# Altium PCB dnt_mko.PcbDoc (part 1 of 2)
Units mm, origin at the board's own origin, x right, y up, seen from the top; angles counter-clockwise.
Board outline 128.25 x 60.25 mm, 6 copper layers (Top Layer, Signal Layer 1, Signal Layer 2, GND plane, Power layer, Bottom Layer), stack 1.5 mm thick; 122 components, 105 nets, 539 pads, 282 vias.
Unrouted connection lines stored in the file: 1.
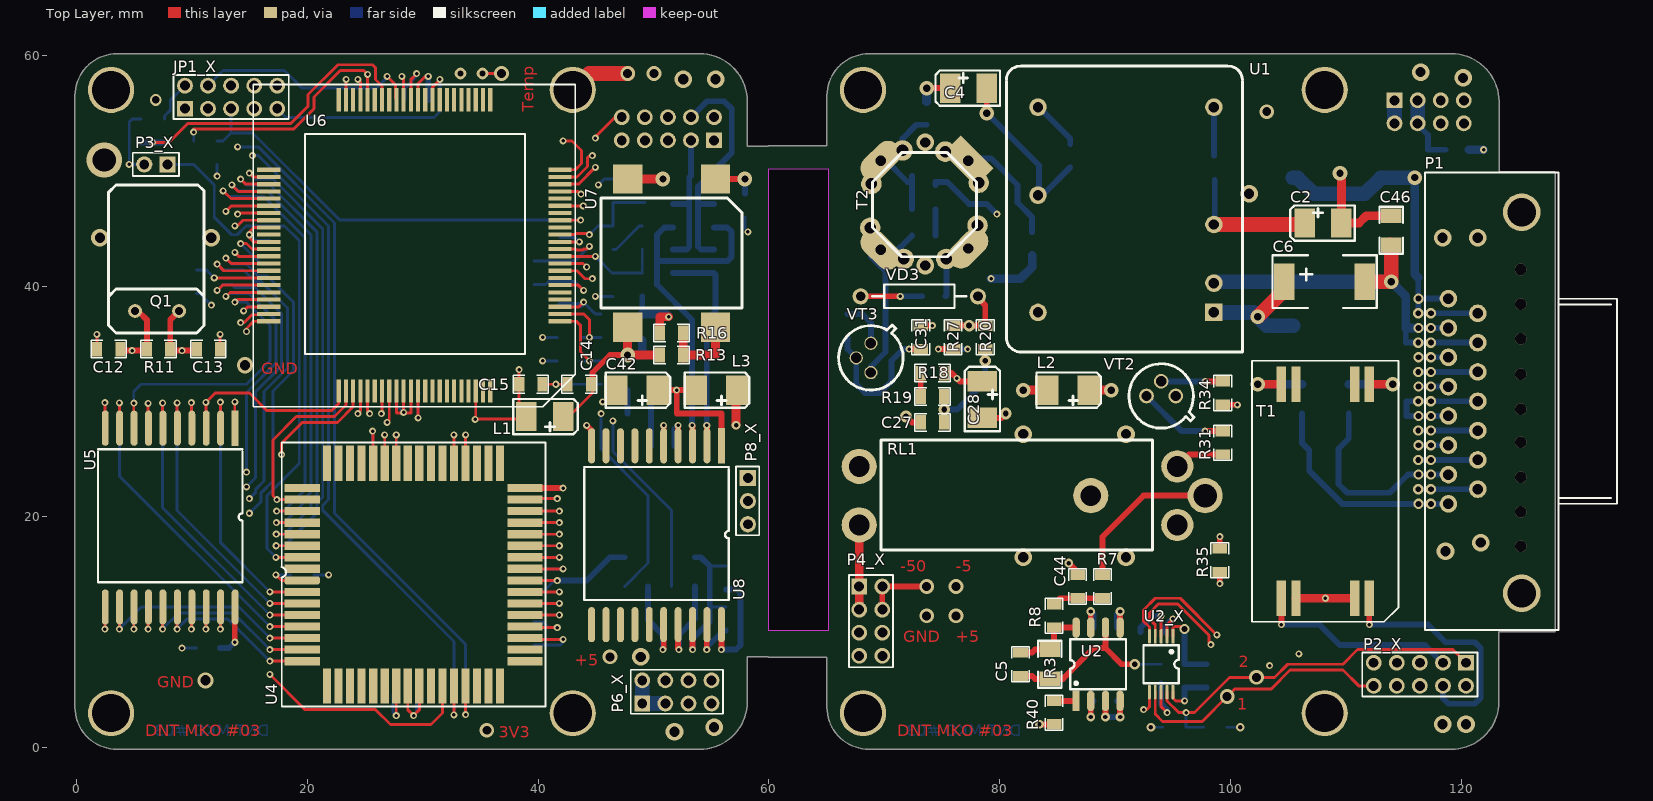
[diagram p0: Top Layer view]
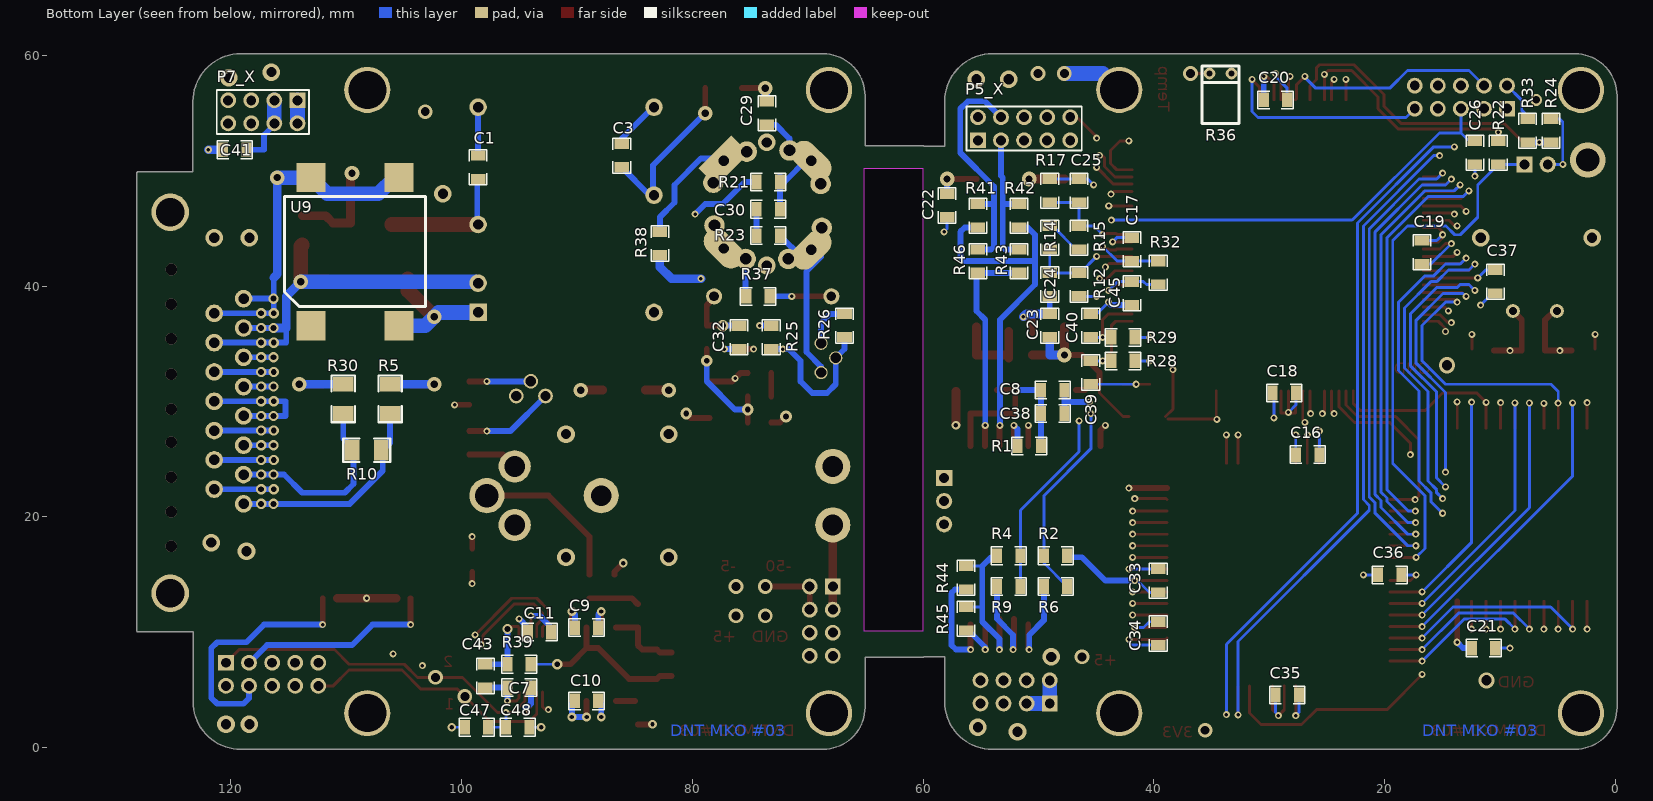
[diagram p1: Bottom Layer view, seen from below]
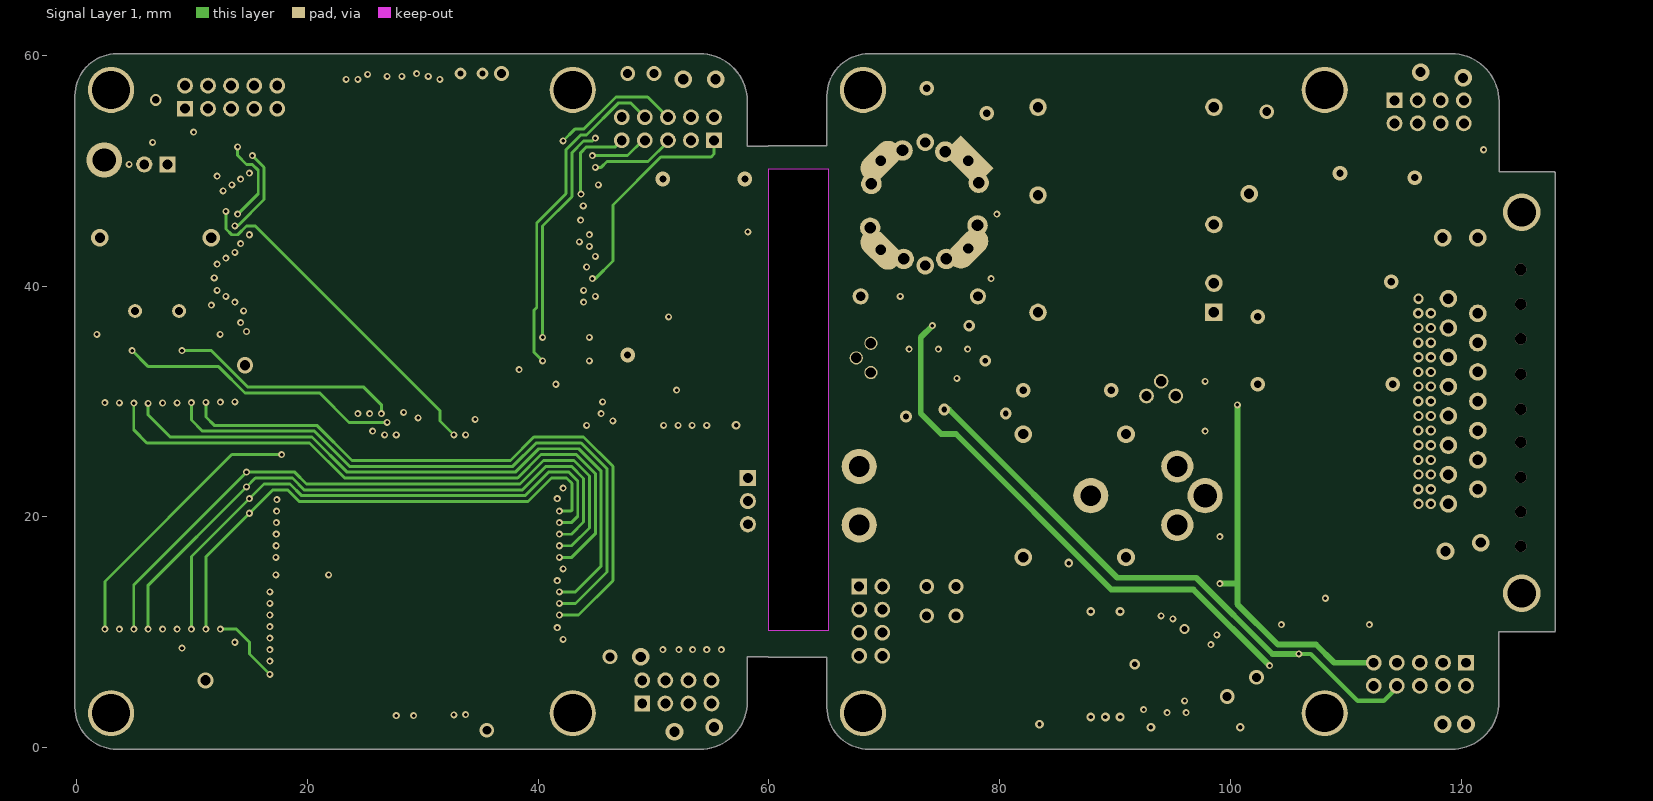
[diagram p2: Signal Layer 1]
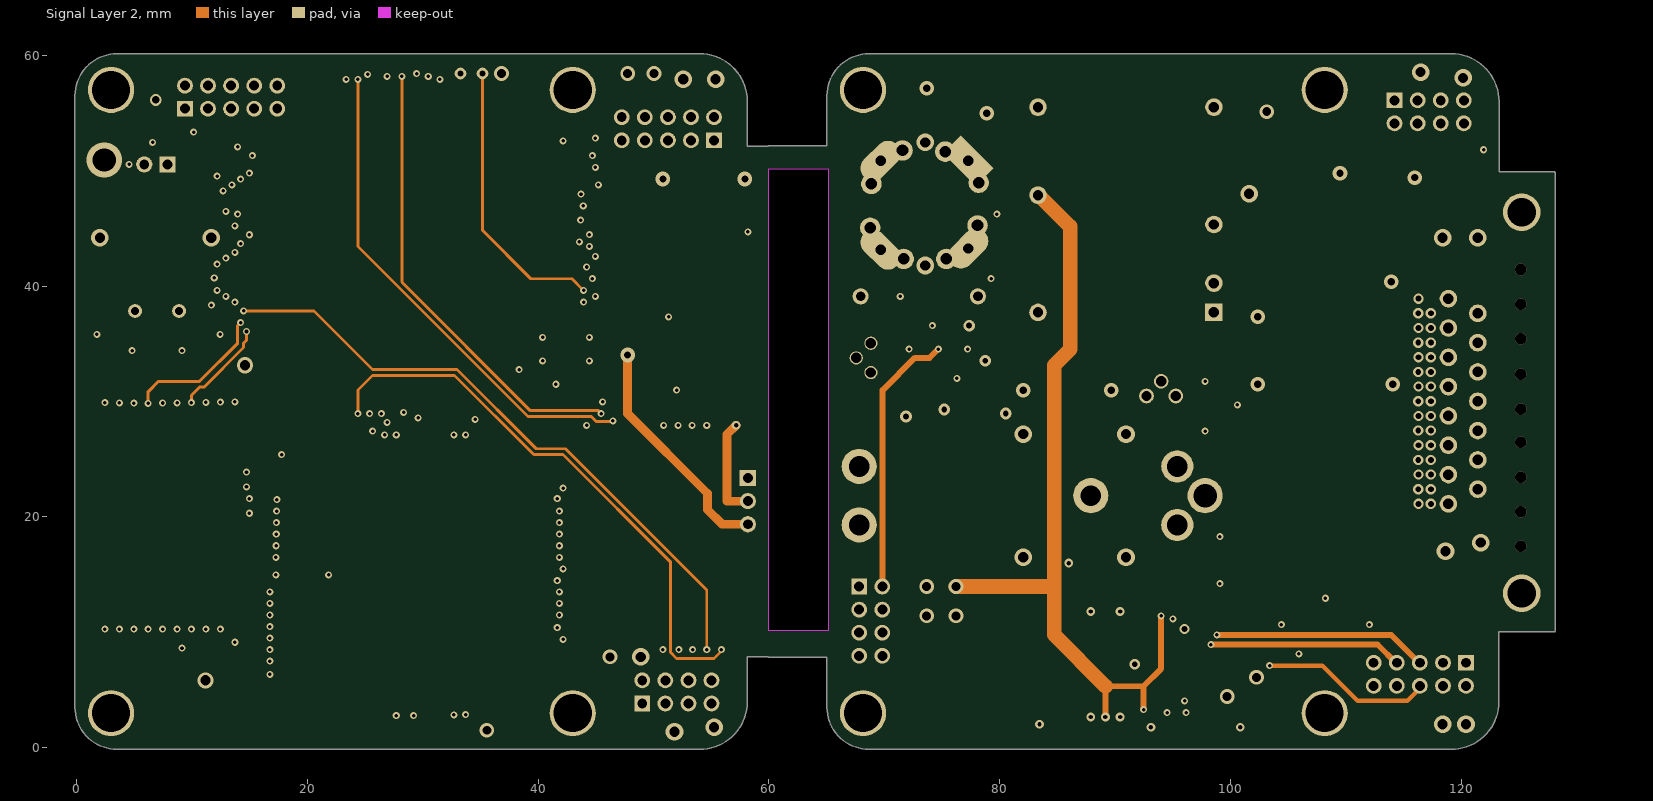
[diagram p3: Signal Layer 2]
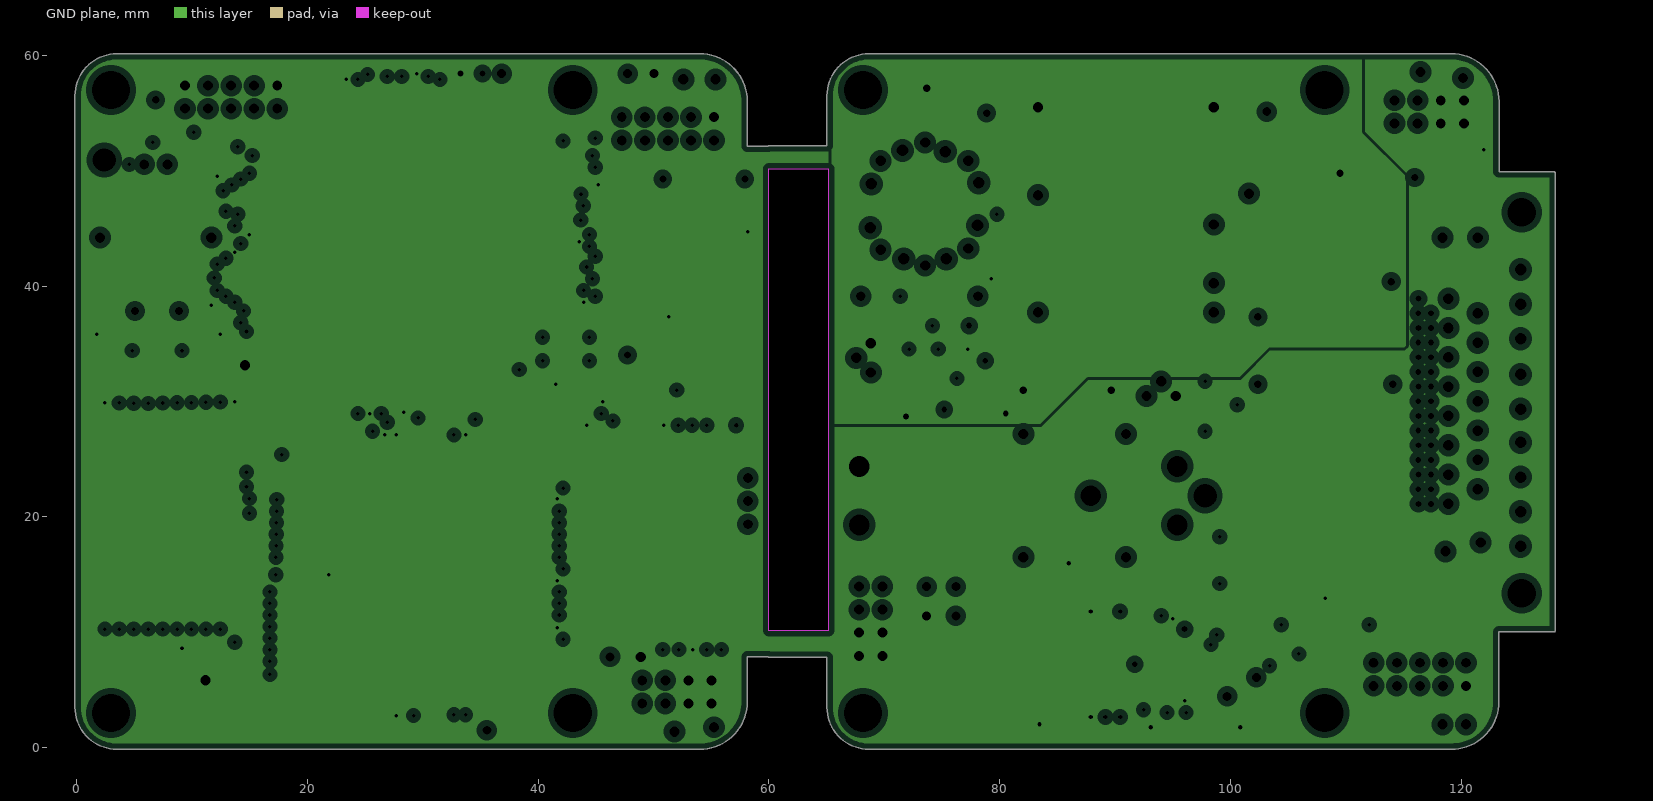
[diagram p4: GND plane, clearances drawn from the general rule]
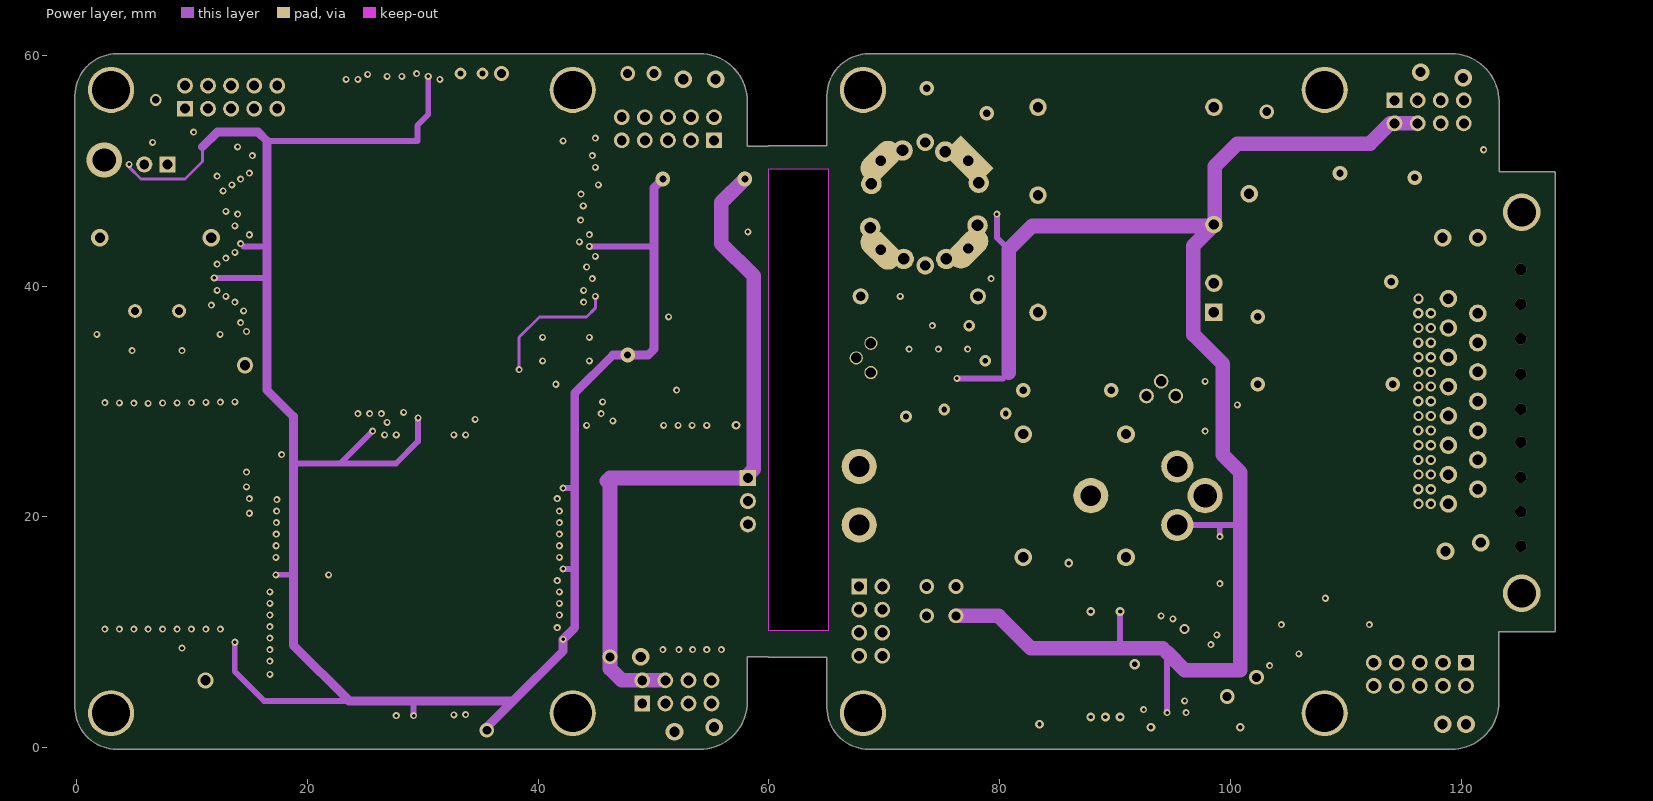
[diagram p5: Power layer]

## Layer stack, top to bottom
Top Layer: signal copper 0.03
Dielectric1: core 0.35, FR-4, Dk 4.8
Signal Layer 1: signal copper 0.03
Dielectric 5: prepreg 0.12, Dk 4.2
Signal Layer 2: signal copper 0.36
Dielectric 4: core 0.2, Dk 4.2
GND plane: plane copper 0.03, net (Multiple Nets)
Dielectric3: prepreg 0.12, FR-4, Dk 4.2
Power layer: signal copper 0.03
Dielectric2: core 0.2, FR-4, Dk 4.2
Bottom Layer: signal copper 0.03

## Board outline
3.5,-0.127 54,-0.127 ccw(c54,4) 58.127,4 58.127,7.873 59.92,7.873 ccw(c60,8) 60,7.85 65.024,7.85 65.024,3.5 ccw(c68.651,3.5) 68.651,-0.127 119.38,-0.127 ccw(c119.38,0) 119.433,-0.116 ccw(c119.123,4) 123.25,4 123.25,10.033 128,10.033 ccw(c128,10.16) 128.127,10.16 128.127,49.784 ccw(c128,49.784) 128,49.911 123.253,49.911 123.253,56 ccw(c119.126,56) 119.126,60.127 68.651,60.127 ccw(c68.651,56.5) 65.024,56.5 65.024,52.15 60,52.15 ccw(c60,52) 59.92,52.127 58.127,52.127 58.127,56 ccw(c54,56) 54,60.127 3.5,60.127 ccw(c3.5,56.5) -0.127,56.5 -0.127,3.5 ccw(c3.5,3.5)
cut-out: 60,50.165 65.151,50.165 65.151,10.16 60,10.16

## Design rules (kind name [scope] priority, off if disabled: settings)
Clearance [All] p1: gap=0.2 ignorepadtopadclearanceinfootprint=FALSE
PlaneClearance [All] p1: clearance=0.508
PlaneConnect [All] p1: planeconnectstyle=Relief reliefexpansion=0.508 reliefentries=4 reliefconductorwidth=0.254 reliefairgap=0.254
PolygonConnect [All] p1: connectstyle=Relief reliefconductorwidth=0.254 reliefentries=4 polygonreliefangle="90 Angle" airgapwidth=0.254
RoutingVias [All] p1: holewidth=0.711 width=1.27 viastyle="Through Hole" minholewidth=0.2 minwidth=0.61 maxholewidth=0.711 maxwidth=1.27
SilkToSolderMaskClearance SilkscreenOverComponentPads [IsPad] p1: minsilkscreentomaskgap=0.254 clearancetoexposedcopper=TRUE
SolderMaskExpansion [All] p1: expansion=0.102 istentingtop=FALSE
Width [All] p1: maxlimit=1.27 minlimit=0.254 preferedwidth=0.254
27 further rules are at their usual default settings.

## Components (designator, comment, footprint, x,y, rotation, side; value= is the part's Value field where it differs from the comment)
C1 "0.1uF" CR-0805 98.552,51.308 r270 bottom
C2 "22uF 16V" C_SMD_SIZE_B#1 106.426,45.466 r0 top
C3 "0.1uF" CR-0805 86.106,50.292 r90 bottom
C4 "22uF 16V" C_SMD_SIZE_B#1 75.692,57.15 r0 top
C5 "1500 pF" CR-0805 81.788,6.223 r90 top
C6 "15мкФ, 50В" C_SMD_size_D 104.648,40.386 r0 top
C7 "0.1uF" CR-0805 93.98,5.207 r0 bottom
C8 "10uF" CR-0805 47.752,30.988 r0 bottom
C9 "0.1uF" CR-0805 90.17,10.414 r180 bottom
C10 "0.1uF" CR-0805 90.17,4.064 r180 bottom
C11 "0.1uF" CR-0805 94.234,10.033 r180 bottom
C12 "24pF" CR-0805 1.778,34.544 r0 top
C13 "24pF" CR-0805 12.446,34.544 r180 top
C14 "0.22uF" CR-0805 42.545,31.496 r0 top
C15 "0.22uF" CR-0805 40.386,31.496 r180 top
C16 "0.22uF" CR-0805 27.686,25.4 r180 bottom
C17 "0.22uF" CR-0805 41.91,44.196 r270 bottom
C18 "0.22uF" CR-0805 27.686,30.734 r0 bottom
C19 "0.22uF" CR-0805 16.764,43.942 r270 bottom
C20 "0.22uF" CR-0805 28.448,56.134 r0 bottom
C21 "0.22uF" CR-0805 12.446,8.636 r180 bottom
C22 "10uF" CR-0805 57.912,48.006 r270 bottom
C23 "10uF" CR-0805 49.022,35.56 r90 bottom
C24 "0.22uF" CR-0805 49.022,41.148 r270 bottom
C25 "0.22uF" CR-0805 46.482,47.244 r90 bottom
C26 "0.22uF" CR-0805 12.192,52.578 r270 bottom
C27 "10nF" CR-0805 73.152,28.194 r0 top
C28 "22uF 16V" C_SMD_SIZE_B#1 78.486,31.75 r270 top
C29 "1uF" CR-0805 73.533,53.975 r90 bottom
C30 "3300pF" CR-0805 72.39,46.66 r0 bottom
C31 "1000pF" CR-0805 73.152,34.544 r90 top
C32 "0.47uF 100V" CR-0805 75.946,34.544 r90 bottom
C33 "0.22uF" CR-0805 39.624,13.462 r90 bottom
C34 "0.22uF" CR-0805 39.624,10.922 r270 bottom
C35 "0.22uF" CR-0805 27.432,4.572 r0 bottom
C36 "0.22uF" CR-0805 20.574,14.986 r180 bottom
C37 "0.22uF" CR-0805 10.414,39.37 r90 bottom
C38 "0.1uF" CR-0805 47.752,28.956 r0 bottom
C39 "4.7uF" CR-0805 45.466,31.496 r90 bottom
C40 "4.7uF" CR-0805 45.466,35.56 r90 bottom
C41 "10uF" CR-0805 118.618,51.816 r0 bottom
C42 "22uF 16V" C_SMD_SIZE_B#2 50.292,30.988 r180 top
C43 "4.7uF" CR-0805 97.917,5.207 r90 bottom
C44 "480n" CR-0805 86.741,14.986 r270 top
C45 "10u" CR-0805 41.91,40.386 r270 bottom
C46 "1nF" CR-1206 113.919,43.561 r90 top
C47 "4.7uF" CR-0805 99.695,1.778 r180 bottom
C48 "0.1uF" CR-0805 96.139,1.778 r180 bottom
JP1_X "" IDC2-10 9.398,55.372 r90 top
L1 "22uH" C_SMD_SIZE_B#1 42.164,28.702 r180 top
L2 "22uH" C_SMD_SIZE_B#2 87.63,30.988 r180 top
L3 "10uH" C_SMD_SIZE_B#2 57.15,30.988 r180 top
P1 "MDM-15" MDM-15 125.222,13.386 r90 top
P2_X "Header 5X2" IDC2-10 120.396,7.366 r270 top
P3_X "Перемычка программирования" IDC2-2 7.874,50.546 r180 top
P4_X "Header 4X2" IDC2-8 67.818,13.97 r0 top
P5_X "Header 5X2" IDC2-10 55.245,52.634 r90 bottom
P6_X "Header 4X2" IDC2-8 49.022,3.842 r90 top
P7_X "Header 4X2" IDC2-8 114.205,56.102 r270 bottom
P8_X "Разъем" IDC2-3 58.166,23.368 r270 top
Q1 "20MHz" RK-386MM 5.08,37.846 r0 top
R1 "1K" CR-0805 51.816,26.162 r180 bottom
R2 "1K" CR-0805 47.498,16.637 r0 bottom
R3 "5M" CR-1206 84.328,8.509 r270 top
R4 "1K" CR-0805 53.594,16.637 r180 bottom
R5 "56" CR-1206 106.172,31.496 r270 bottom
R6 "560" CR-0805 47.498,13.97 r0 bottom
R7 "1K" CR-0805 88.9,12.954 r90 top
R8 "9k1" CR-0805 84.709,12.446 r270 top
R9 "560" CR-0805 51.562,13.97 r0 bottom
R10 "68" CR-1206 109.474,25.781 r180 bottom
R11 "910k" CR-0805 8.128,34.544 r180 top
R12 "1k1" CR-0805 46.482,39.116 r90 bottom
R13 "1.2k" CR-0805 50.546,34.036 r0 top
R14 "2k4" CR-0805 49.022,43.18 r90 bottom
R15 "100" CR-0805 46.482,43.18 r90 bottom
R16 "2k" CR-0805 50.546,35.941 r0 top
R17 "360" CR-0805 49.022,47.244 r90 bottom
R18 "330" CR-0805 75.184,32.461 r180 top
R19 "7k5" CR-0805 73.152,30.429 r0 top
R20 "100k" CR-0805 78.74,34.544 r90 top
R21 "100" CR-0805 74.422,49.022 r180 bottom
R22 "27" CR-0805 10.16,52.578 r270 bottom
R23 "330" CR-0805 74.422,44.374 r180 bottom
R24 "NU" CR-0805 5.588,54.483 r270 bottom
R25 "180" CR-0805 73.152,36.576 r270 bottom
R26 "1k" CR-0805 66.802,37.592 r270 bottom
R27 "100k" CR-0805 75.946,34.544 r90 top
R28 "100" CR-0805 41.656,33.528 r0 bottom
R29 "100" CR-0805 41.656,35.56 r0 bottom
R30 "56" CR-1206 110.236,31.496 r270 bottom
R31 "100" CR-0805 99.314,25.4 r90 top
R32 "1000" CR-0805 39.624,40.132 r90 bottom
R33 "2k" CR-0805 7.62,54.483 r270 bottom
R34 "2k" CR-0805 99.314,31.75 r270 top
R35 "2k" CR-0805 99.06,17.272 r270 top
R36 "Pt1000" Pt100 33.274,58.42 r0 bottom value=1000
R37 "0" CR-0805 73.279,39.116 r0 bottom
R38 "0" CR-0805 82.804,42.672 r90 bottom
R39 "100" CR-0805 96.012,7.239 r180 bottom
R40 "68" CR-0805 84.709,4.064 r270 top
R41 "0" CR-0805 55.245,45.085 r90 bottom
R42 "NU" CR-0805 51.689,45.085 r90 bottom
R43 "0" CR-0805 51.689,41.148 r90 bottom
R44 "10к" CR-0805 56.261,13.716 r90 bottom
R45 "10к" CR-0805 56.261,10.16 r90 bottom
R46 "NU" CR-0805 55.245,41.148 r90 bottom
RL1 "РЭС55" РЭС55 67.818,24.384 r0 top
T1 "ТИЛ-6В \"ВП\"" ТИЛ6В 114.554,33.528 r270 top
T2 "TRANS" "TRANS 50V" 77.47,51.054 r270 top
U1 "СМПВ 1,5 5,0 ДВ1" "SLH 2805" 101.016,34.29 r180 top
U2 "ADA4530" SO-8 86.614,4.064 r0 top
U2_X "AD8253" u_SO-10 94.996,9.652 r180 top
U4 "1645РТ2У" 5134.64-6 17.907,14.249 r0 top
U5 "1554ИР22" "20PIN FLATPACK" 13.743,27.692 r270 top
U6 "1874BE7T" 4235.88-1 38.862,34.036 r180 top
U7 "1278ЕР1Т «ВП»" "1278ЕР1Т - БУ" 57.658,38.1 r180 top
U8 "5559ИН67Т" "20PIN FLATPACK" 55.88,26.162 r270 top
U9 "2D222" "1278ЕР1Т - БУ" 115.316,47.752 r180 bottom
VD3 "UF4007" AXIAL-0.4 73.025,39.116 r180 top
VT2 "2Т3117А/ПК ОСМ" 2Д3117А#1 93.98,30.48 r0 top
VT3 "2Т3117А/ПК ОСМ" 2Д3117А#2 68.834,33.782 r90 top

## Footprints (in the part's own frame and the unit in brackets; to place one, negate y for a bottom-side part, rotate by r counter-clockwise, add the part's x,y. Pads: shape width x height; smd on the part's side, far side on the other; paste and mask are expansions set on the pad)
2Д3117А#1 [mm]
  round 1.27 hole 0.9: 1(1.27,0) 2(0,1.27) 3(-1.27,0)
  silkscreen extent -2.79,-2.79 2.86,2.79, body extent -2.79,-2.79 2.77,2.78, height 6.63
2Д3117А#2 [mm]
  round 1.143 hole 0.9: 1(1.27,0) 2(0,1.27) 3(-1.27,0)
  silkscreen extent -2.79,-2.79 2.86,2.79, body extent -2.79,-2.79 2.77,2.78, height 6.63
"20PIN FLATPACK" [mm]
  rect 3.048x0.6 smd: 1(0,0)
  oval 3.048x0.6 smd: 2(0,-1.25) 3(0,-2.5) 4(0,-3.75) 5(0,-5) 6(0,-6.25) 7(0,-7.5) 8(0,-8.75) 9(0,-10) 10(0,-11.25) 11(15.492,-11.25) 12(15.492,-10) 13(15.492,-8.75) 14(15.492,-7.5) 15(15.492,-6.25) 16(15.492,-5) 17(15.492,-3.75) 18(15.492,-2.5) 19(15.492,-1.25) 20(15.492,0)
  silkscreen extent 1.83,-11.88 13.36,0.64, body extent 1.47,-11.94 13.92,0.64, height 3.02
"1278ЕР1Т - БУ" [mil]
  rect 100x100 smd: 2(90,-440) 8(390,-440) 11(390,65) 17(90,65)
  silkscreen extent 0,-375 480,0, body extent 0,-375 480,0, height 125
4235.88-1 [mm]
  rect 2x0.36 smd mask+0.051: 1(-3.048,-2.921) 2(-3.048,-3.546) 3(-3.048,-4.171) 4(-3.048,-4.796) 5(-3.048,-5.421) 6(-3.048,-6.046) 7(-3.048,-6.671) 8(-3.048,-7.296) 9(-3.048,-7.921) 10(-3.048,-8.546) 11(-3.048,-9.171) 12(-3.048,-9.796) 13(-3.048,-10.421) 14(-3.048,-11.046) 15(-3.048,-11.671) 16(-3.048,-12.296) 17(-3.048,-12.921) 18(-3.048,-13.546) 19(-3.048,-14.171) 20(-3.048,-14.796) 21(-3.048,-15.421) 22(-3.048,-16.046) 45(22.202,-16.046) 46(22.202,-15.421) 47(22.202,-14.796) 48(22.202,-14.171) 49(22.202,-13.546) 50(22.202,-12.921) 51(22.202,-12.296) 52(22.202,-11.671) 53(22.202,-11.046) 54(22.202,-10.421) 55(22.202,-9.796) 56(22.202,-9.171) 57(22.202,-8.546) 58(22.202,-7.921) 59(22.202,-7.296) 60(22.202,-6.671) 61(22.202,-6.046) 62(22.202,-5.421) 63(22.202,-4.796) 64(22.202,-4.171) 65(22.202,-3.546) 66(22.202,-2.921)
  rect 0.36x2 smd mask+0.051: 23(3.014,-22.109) 24(3.639,-22.109) 25(4.264,-22.109) 26(4.89,-22.109) 27(5.515,-22.109) 28(6.14,-22.109) 29(6.765,-22.109) 30(7.39,-22.109) 31(8.015,-22.109) 32(8.64,-22.109) 33(9.265,-22.109) 34(9.89,-22.109) 35(10.515,-22.109) 36(11.14,-22.109) 37(11.765,-22.109) 38(12.39,-22.109) 39(13.015,-22.109) 40(13.64,-22.109) 41(14.265,-22.109) 42(14.89,-22.109) 43(15.515,-22.109) 44(16.14,-22.109) 67(16.14,3.141) 68(15.515,3.141) 69(14.89,3.141) 70(14.265,3.141) 71(13.64,3.141) 72(13.015,3.141) 73(12.39,3.141) 74(11.765,3.141) 75(11.14,3.141) 76(10.515,3.141) 77(9.89,3.141) 78(9.265,3.141) 79(8.64,3.141) 80(8.015,3.141) 81(7.39,3.141) 82(6.765,3.141) 83(6.14,3.141) 84(5.515,3.141) 85(4.889,3.141) 86(4.264,3.141) 87(3.639,3.141) 88(3.014,3.141)
  silkscreen extent -4.35,-23.42 23.55,4.48, body extent 0,-19.05 19.05,0, height 3.1
5134.64-6 [mil]
  rrect50% 120x28 smd: 1(65,10)
  rect 120x28 smd: 2(65,-29.37) 3(65,-68.74) 4(65,-108.11) 5(65,-147.48) 6(65,-186.85) 7(65,-226.22) 8(65,-265.59) 25(824.84,-265.59) 26(824.84,-226.22) 27(824.84,-186.85) 28(824.84,-147.48) 29(824.84,-108.11) 30(824.84,-68.74) 31(824.84,-29.37) 32(824.84,10) 33(824.84,49.37) 34(824.84,88.74) 35(824.84,128.11) 36(824.84,167.48) 37(824.84,206.85) 38(824.84,246.22) 39(824.84,285.59) 40(824.84,324.96) 57(65,324.96) 58(65,285.59) 59(65,246.22) 60(65,206.85) 61(65,167.48) 62(65,128.11) 63(65,88.74) 64(65,49.37)
  rect 28x120 smd: 9(149.65,-350.24) 10(189.02,-350.24) 11(228.39,-350.24) 12(267.76,-350.24) 13(307.13,-350.24) 14(346.5,-350.24) 15(385.87,-350.24) 16(425.24,-350.24) 17(464.61,-350.24) 18(503.98,-350.24) 19(543.35,-350.24) 20(582.72,-350.24) 21(622.09,-350.24) 22(661.46,-350.24) 23(700.83,-350.24) 24(740.2,-350.24) 41(740.2,409.61) 42(700.83,409.61) 43(661.46,409.61) 44(622.09,409.61) 45(582.72,409.61) 46(543.35,409.61) 47(503.98,409.61) 48(464.61,409.61) 49(425.24,409.61) 50(385.87,409.61) 51(346.5,409.61) 52(307.13,409.61) 53(267.76,409.61) 54(228.39,409.61) 55(189.02,409.61) 56(149.65,409.61)
  silkscreen extent -5,-420 895,480, body extent 85,-330 800,390, height 126
AXIAL-0.4 [mm] "Resistor; 2 Leads"
  round 1.4 hole 0.85: 1(-5.08,0) 2(5.08,0)
  silkscreen extent -4.06,-1.02 4.06,1.02
C_SMD_SIZE_B#1 [mil]
  rect 70x100 smd: 1(0,0) 2(125,0)
  silkscreen extent -50,-60 170,60, body extent -5,-55 135,55, height 75
C_SMD_SIZE_B#2 [mil]
  rect 80x100 smd: 1(-5,0) 2(140,0)
  silkscreen extent -45,-60 175,60, body extent 0,-55 140,55, height 75
C_SMD_size_D [mil]
  rect 70x125 smd: 1(0,0) 2(275,0)
  silkscreen extent -40,-90 315,90, body extent -5,-85 285,85, height 162
CR-0805 [mil]
  rect 35x50 smd: 1(0,0) 2(80,0)
  silkscreen extent -20,-30 100,30, body extent -5,-25 75,25, height 50
CR-1206 [mm]
  rect 1.27x1.8 smd: 1(0,0) 2(2.54,0)
  silkscreen extent -0.76,-1.02 3.3,1.02, body extent -0.25,-0.76 2.79,0.76, height 0.51
IDC2-2 [mm]
  rect 1.4x1.4 hole 0.864: 1(0,0)
  round 1.4 hole 0.864: 2(2,0)
  silkscreen extent -1,-1.02 3,1
IDC2-3 [mm]
  rect 1.4x1.4 hole 0.864: 1(0,0)
  round 1.4 hole 0.864: 2(2,0) 3(4,0)
  silkscreen extent -1,-1.02 4.95,1
IDC2-8 [mil]
  rect 54x54 hole 34: 1(0,0)
  round 54 hole 34: 2(78.74,0) 3(0,-78.74) 4(78.74,-78.74) 5(0,-157.48) 6(78.74,-157.48) 7(0,-236.22) 8(78.74,-236.22)
  silkscreen extent -35,-275 115,39
IDC2-10 [mil]
  rect 54x54 hole 34: 1(0,0)
  round 54 hole 34: 2(78.74,0) 3(0,-78.74) 4(78.74,-78.74) 5(0,-157.48) 6(78.74,-157.48) 7(0,-236.22) 8(78.74,-236.22) 9(0,-314.96) 10(78.74,-314.96)
  silkscreen extent -35,-354 115,39
MDM-15 [mil]
  round 128 hole 98.43: 0(0,0) 0(1300,0)
  round 60 hole 36: 1(305,250) 2(405,250) 3(505,250) 4(605,250) 5(705,250) 6(805,250) 7(905,250) 8(1005,250) 9(355,150) 10(455,150) 11(555,150) 12(655,150) 13(755,150) 14(855,150) 15(955,150)
  silkscreen extent -125,-325 1435,330, body extent -125,-120 1435,330, height 308
Pt100 [mil]
  round 40 hole 20: 1(0,0) 2(75,0)
  silkscreen extent -25,-25 100,170, body extent 15,45 55,165, height 40
RK-386MM [mm]
  round 1.2 hole 0.7: 1(0,0) 2(3.81,0)
  silkscreen extent -2.29,-1.91 5.97,10.92, body extent -2.29,1.91 5.97,10.92, height 3.7
"SLH 2805" [mil]
  rect 60x60 hole 35.43: 1(97,-135)
  round 60 hole 35.43: 2(97,-235) 3(97,-435) 4(97,-835) 5(697,-835) 6(697,-535) 7(697,-135)
  silkscreen extent 0,-975 805,0, body extent 0,-980 805,0, height 270
SO-8 [mil]
  rect 23.62x70 smd: 1(0,0)
  oval 25x70 smd: 2(50,0) 3(100,0) 4(150,0) 5(150,250) 6(100,250) 7(50,250) 8(0,250)
  silkscreen extent -20,40 170,210, body extent -20,40 170,210, height 68
"TRANS 50V" [mm]
  round 1.778 hole 1: 1(-0.6,-2.2) 1(2.1,0.7) 2(-0.7,-5.9) 2(2.2,-8.6) 3(6,-8.7) 3(8.7,-5.8) 4(5.8,0.6) 4(8.7,-2.1)
  rect 4x2.2 hole 0.9 rot 45: 1(0.2,-0.2)
  oval 4x2.2 hole 0.9 rot 135: 2(0.2,-7.8) 4(7.8,-0.2)
  oval 4x2.2 hole 0.9 rot 45: 3(7.9,-7.8)
  silkscreen extent -0.51,-8.51 8.51,0.51, body extent -0.51,-8.51 8.64,0.51, height 5
u_SO-10 [mil]
  rect 10x50 smd: 1(0,0)
  oval 10x50 smd: 2(20,0) 3(40,0) 4(60,0) 5(80,0) 6(80,190) 7(60,190) 8(40,190) 9(20,190) 10(0,190)
  silkscreen extent -20,30 100,160
РЭС55 [mil]
  round 120 hole 71: 0(790,-100) 1(0,0) 2(0,-200)
  round 120 hole 80: 3(1180,-100)
  round 110 hole 71: A(1085,-200) B(1085,0)
  silkscreen extent 75,-285 1000,90, body extent -30,-285 1205,88, height 373
ТИЛ6В [mil]
  rect 120x32 smd: 1(810,-100) 2(810,-150) 3(810,-350) 4(810,-400) 5(80,-400) 6(80,-350) 7(80,-150) 8(80,-100)
  silkscreen extent 0,-500 890,0, body extent 208,-495 683,0, height 256

## Part data
C1 C3 C5 C7 C8 C9 C10 C11 C12 C13 C14 C15 C16 C17 C18 C19 C20 C21 C22 C23 C24 C25 C26 C27 C29 C30 C31 C32 C33 C34 C35 C36 C37 C38 C39 C40 C41 C43 C44 C45 C46 C47 C48: library part C, "Capacitor", Published=8-Jun-2000, Publisher="Altium Limited", Revision="July-2002: Re-released for DXP Platform.", Назначение="Конденсатор керамический"
  C1 C3 C12 C13 C14 C15 C16 C17 C18 C19 C20 C21 C22 C23 C24 C25 C26 C27 C29 C30 C31 C32 C33 C34 C35 C36 C37 C39 C40 C41 C45 C46: Наименование="К10-79 МП0 «ВП»"
  C5 C7 C8 C9 C10 C11 C38 C43 C44 C47 C48: Наименование="К10-79 МП0 \"ВП\""
C2 C4 C6 C28 C42: library part C_pol, "Capacitor", Published=8-Jun-2000, Publisher="Altium Limited", Revision="July-2002: Re-released for DXP Platform.", Назначение="Конденсатор танталовый", Наименование="К53-68 «ВП»"
JP1_X: library part "HEADER 5X2"
L1 L2 L3: library part INDUCTOR, "Inductor", Назначение=Индуктивность, Наименование=Индуктивность
P1: library part "D Connector 15", "Receptacle Assembly, 15 Position, Right Angle", Назначение=Разъем, Наименование="МДМ-15 (X809)"
P2_X P5_X: "Header, 5-Pin, Dual row", LatestRevisionDate=17-Jul-2002, LatestRevisionNote="Re-released for DXP Platform.", Publisher="Altium Limited"
P3_X: library part "Header 2", "Header, 2-Pin", Назначение="Перемычка программирования", Наименование="Перемычка программирования"
P4_X P6_X P7_X: "Header, 4-Pin, Dual row", LatestRevisionDate=17-Jul-2002, LatestRevisionNote="Re-released for DXP Platform.", Publisher="Altium Limited"
P8_X: library part "Header 3", "Header, 3-Pin", LatestRevisionDate=17-Jul-2002, LatestRevisionNote="Re-released for DXP Platform.", Publisher="Altium Limited", Назначение="Разъем для выбора питания", Наименование=Разъем
Q1: library part QUARZ, "Resonator", Назначение="Кварцевый резонатор", Наименование=РК-386ММ-4ДР-20000КГЦ-ПМИ
R1 R2 R3 R4 R5 R6 R7 R8 R9 R10 R11 R12 R13 R14 R15 R16 R17 R18 R19 R20 R21 R22 R23 R24 R25 R26 R27 R28 R29 R30 R31 R32 R33 R34 R35 R36 R37 R38 R39 R40 R41 R42 R43 R44 R45 R46: library part R, "Resistor", Revision="July-2002: Re-released for DXP Platform."
  R1 R2 R4 R5 R6 R7 R8 R9 R10 R11 R12 R13 R14 R15 R16 R17 R18 R19 R20 R21 R22 R23 R24 R25 R26 R27 R28 R29 R30 R31 R32 R33 R34 R35 R37 R38 R39 R40 R41 R42 R43 R44 R45 R46: Published=8-Jun-2000, Publisher="Altium Limited", Назначение=ЧИП-резистор, Наименование="Р1-12-0.125 ОСМ"
  R3: Назначение=ЧИП-резистор, Наименование="Р1-12-0.125 ОСМ"
  R36: Published=8-Jun-2000, Publisher="Altium Limited", Назначение=Терморезистор, Наименование=Pt1000
RL1: library part RGK-56, "Реле", Назначение=Реле, Наименование=РЭС55
T1: library part TIL6B, "Transformator", Назначение="Трансформатор МКО", Наименование="ТИЛ-6В \"ВП\""
T2: "Transformer", Назначение=Трансформатор, Наименование=Трансформатор
U1: library part SLH2805, Назначение="DC-DC преобразователь", Наименование="СМПВ 1,5 5,0 ДВ1"
U2: "Ultra-Low Bias Current Difet OpAmp", Назначение="Операционный усилитель", Наименование=ADA4530
U2_X: library part AD8251, "10 MHz, 20 V/мs, G = 1, 2, 4, 8 iCMOS Programmable Gain Instrumentation Amplifier", Назначение="Операционный усилитель", Наименование=AD8253
U6: "Microcontroller", Назначение=Микроконтроллер, Наименование=1874BE7T
U7: library part "1278ER1T VP", Назначение="Линейный регулятор", Наименование="1278ЕР1Т \"ВП\""
VD3: library part DIODE, "Diode", Назначение=Диод, Наименование=UF4007
VT2 VT3: library part 2T3117A, Назначение=Транзистор, Наименование="2Т3117А/ПК ОСМ"
U4: Назначение=ОППЗУ, Наименование=1645РТ2У
U5: Назначение="Восьмиразрядный регистр", Наименование=1554ИР22ТБМ
U8: Назначение="Приемопередатчик манчестерского кода", Наименование=5559ИН67Т
U9: Назанчение="Сдвоенный диод", Наименование=2Д222

## Free pads (board coordinates)
  round 4 hole 3.3: ""(3,3) ""(3,57) ""(43,3) ""(43,57) ""(68.151,3) ""(68.151,57) ""(108.151,3) ""(108.151,57)

## Via types
v1: diameter 0.61, hole 0.305, Top Layer to Bottom Layer, 176 vias
v2: diameter 0.889, hole 0.508, Top Layer to Bottom Layer, 31 vias
v3: diameter 1.524, hole 0.889, Top Layer to Bottom Layer, 22 vias
v4: diameter 1.27, hole 0.762, Top Layer to Bottom Layer, 12 vias
v5: diameter 0.762, hole 0.381, Top Layer to Bottom Layer, 10 vias
v6: diameter 1.27, hole 0.635, Top Layer to Bottom Layer, 10 vias
v7: diameter 1, hole 1, Top Layer to Bottom Layer, 9 vias
v8: diameter 1.016, hole 0.508, Top Layer to Bottom Layer, 5 vias
v9: diameter 1.27, hole 0.61, Top Layer to Bottom Layer, 3 vias
v10: diameter 1.397, hole 0.889, Top Layer to Bottom Layer, 2 vias
v11: diameter 3.048, hole 2.032, Top Layer to Bottom Layer, 1 vias
v12: diameter 1.016, hole 0.635, Top Layer to Bottom Layer, 1 vias

## Nets (pads, with @x,y where several pads share a name; then routed paths per layer and width w, separated by ;. In a path a pad name is that pad's centre, name@x,y a point inside that pad or via, vN(x,y) a via of type N, cw(c..) or ccw(c..) an arc to the next point about the centre after c; other vN are vias at no path point)
0V3: C25.1 R15.2 R17.1 U6.13 | length 9.8
  Top Layer w0.254: U6.13@41.91,44.457 41.92,44.467 43.197,44.467 43.307,44.577 v1@44.45,44.577
  Bottom Layer w0.254: v1(44.45,44.467) 45.195,45.212 R15.2@46.482,45.212 C25.1@46.482,47.244 R17.1@49.022,47.244 R17.1@49.276,47.244
2V25: C24.1 R12.2 R14.1 U6.10 | length 9.7
  Top Layer w0.254: U6.10@41.91,42.582 v1(44.958,42.582)
  Bottom Layer w0.254: v1(44.958,42.582) 46.392,41.148 R12.2@46.482,41.148 C24.1@49.022,41.148 R14.1@49.022,43.18
3V3: C14.2 C16.2 C17.2 C18.2 C19.2 C20.2 C21.1 C23.1 C33.2 C34.2 C35.2 C36.2 C37.2 L1.1 P3_X.2 P8_X.3 R13.1 R24.1 R32.2 U4.1 U4.16 U4.17 U4.27 U4.33 U4.40 U4.52 U5.20 U6.11 U6.33 U6.56 U6.60 U6.78 U7.8 U7.11 | length 315.8
  Top Layer w0.254: v1(11.938,40.707) U6.60@16.66,40.707 ; v1(14.224,43.688) 14.732,43.688 15.213,43.207 U6.56@16.66,43.207 ; v1(17.272,14.986) 17.755,14.503 U4.1@19.558,14.503 ; U4.52@25.708,24.653 v1@25.708,27.432 ; U4.16@28.708,5.353 28.702,5.347 28.702,3.302 v1(29.21,2.794) 29.708,3.292 U4.17@29.708,5.353 ; v1(29.597,28.581) U6.78@29.597,30.895 ; U6.33@29.597,56.145 29.597,57.537 30.226,58.166 v1(30.48,58.166) ; U4.27@38.858,9.503 38.963,9.398 v1(42.164,9.398) ; U4.33@38.858,15.503 38.867,15.494 v1(42.164,15.494) ; U6.11@41.91,43.207 43.233,43.207 43.294,43.146 43.862,43.146 43.923,43.207 44.223,43.207 v1(44.45,43.434) ; L1.1@42.164,28.702 42.672,28.702 44.704,30.734 C14.2@44.704,31.496
  Top Layer w0.508: v1(13.716,9.144) U5.20@13.716,12.694 ; U4.40@38.858,22.503 v1(42.164,22.503) ; C14.2@44.704,31.496 44.704,32.512 46.228,34.036 v9(47.752,34.036)
  Top Layer w0.762: v9(47.752,34.036) U7.11@47.752,36.449 ; U7.8@47.752,49.276 v9(50.8,49.276) ; v9@48.006,34.036 R13.1@50.546,34.036
  Power layer w0.254: v1(4.572,50.546) 4.572,50.292 5.588,49.276 9.398,49.276 10.922,50.8 10.922,52.07
  Power layer w0.508: v1(11.938,40.707) 16.323,40.707 ; v1(13.716,9.144) 13.716,6.604 16.256,4.064 23.622,4.064 ; v1(14.224,43.688) 14.478,43.434 16.51,43.434 ; 16.51,52.578 29.547,52.578 29.547,53.931 30.48,54.864 v1(30.48,58.166) ; v1(17.272,14.986) 18.796,14.986 ; 18.796,24.638 22.86,24.638 ; v1(25.654,27.432) 22.86,24.638 ; v1(29.21,2.794) 29.21,4.064 ; v1(29.597,28.581) 29.597,26.549 27.686,24.638 22.86,24.638 ; v1(42.164,15.494) 43.171,15.494 43.18,15.503 ; v1(42.164,22.503) 43.029,22.503 ; v1(44.45,43.434) 50.038,43.434
  Power layer w0.762: 10.922,52.07 12.192,53.34 15.748,53.34 16.51,52.578 16.51,43.434 16.51,30.988 18.796,28.702 18.796,24.638 18.796,14.986 18.796,8.89 23.622,4.064 29.21,4.064 37.846,4.064 ; v4(35.56,1.524) 35.56,1.778 37.846,4.064 ; v9(50.8,49.276) 50.038,48.514 50.038,43.434 50.038,34.544 49.53,34.036 v9(47.752,34.036) 46.482,34.036 43.18,30.734 43.18,15.503 43.18,10.414 v1(42.164,9.398) 42.164,8.382 37.846,4.064
  Signal Layer 2 w0.762: v9(47.752,34.036) 47.752,28.956 54.674,22.034 54.674,20.637 55.943,19.368 P8_X.3@58.166,19.368
  Bottom Layer w0.254: R24.1@5.588,54.483 4.826,54.483 4.572,54.229 v1(4.572,50.546) P3_X.2@5.874,50.546 ; C37.2@10.414,41.402 11.243,41.402 v1(11.938,40.707) ; v1(14.224,43.688) 16.002,41.91 C19.2@16.764,41.91 ; v1(17.272,14.986) C36.2@18.542,14.986 ; C16.2@25.654,25.4 v1(25.654,27.432) ; v1(29.21,2.794) 29.464,3.048 C35.2@29.464,4.572 ; v1(29.597,28.581) 29.597,30.613 C18.2@29.718,30.734 ; C34.2@39.624,8.89 41.91,8.89 42.164,9.144 v1(42.164,9.398) ; R32.2@39.624,42.164 C17.2@41.91,42.164 43.18,42.164 v1(44.45,43.434) ; C33.2@39.633,15.503 39.643,15.494 v1(42.164,15.494)
  Bottom Layer w0.508: C21.1@12.446,8.636 13.208,8.636 v1(13.716,9.144) ; C20.2@30.48,56.134 v1(30.48,58.166)
  Bottom Layer w0.762: v9(47.752,34.036) 49.022,34.036 C23.1@49.022,35.306
3V3A: C15.2 L1.2 R12.1 U6.86 | length 23.9
  Top Layer w0.254: U6.86@34.598,30.895 34.598,28.502 L1.2@38.789,28.502 ; v1(38.354,32.766) C15.2@38.354,31.496 38.354,29.337 L1.2@38.989,28.702
  Power layer w0.254: v1(38.354,32.766) 38.354,35.56 40.127,37.333 44.201,37.333 44.958,38.09 v1(44.958,39.116)
  Bottom Layer w0.254: v1(44.958,39.116) R12.1@46.482,39.116
  other v1: 34.544,28.448
+5V: C1.2 C2.1 C7.1 C9.1 C22.1 C28.1 C41.1 P6_X.1 P6_X.2 P6_X.3 P6_X.4 P7_X.1 P7_X.2 P7_X.3 P7_X.4 P8_X.1 R18.1 R21.1 R35.1 RL1.A U1.3 U2.5 U2_X.8 U7.2 | length 252.1
  Top Layer w0.254: U2_X.8@93.98,4.826 93.98,3.556 v1(94.488,3.048)
  Top Layer w0.508: U7.2@55.372,49.276 v9(57.912,49.276) ; R18.1@75.184,32.461 75.83,32.461 v1(76.287,32.004) 76.541,31.75 C28.1@78.486,31.75 ; U2.5@90.424,10.414 v5(90.424,11.811) ; R35.1@99.06,17.272 v1(99.06,18.288)
  Top Layer w1.27: U1.3@98.628,45.339 C2.1@106.045,45.339
  Power layer w0.508: v1(76.287,32.004) 80.264,32.004 80.772,32.512 ; v1(79.756,46.228) 79.756,44.196 80.772,43.18 ; 90.297,8.636 90.424,8.763 v5(90.424,11.811) ; 94.107,8.636 94.488,8.255 v1(94.488,3.048) ; RL1.A@95.377,19.304 99.06,19.304 ; v1(99.06,18.288) 99.06,19.304 ; 100.838,19.304 99.06,19.304
  Power layer w1.27: P6_X.4@51.022,5.842 P6_X.2@49.022,5.842 47.244,5.842 46.228,6.858 v4(46.228,7.874) 46.228,22.86 45.974,23.114 46.228,23.368 P8_X.1@58.166,23.368 ; v9(57.912,49.276) 55.88,47.244 55.88,43.688 58.674,40.894 58.674,24.13 P8_X.1@58.166,23.622 ; v4(76.2,11.43) 79.883,11.43 82.677,8.636 90.297,8.636 94.107,8.636 ; 80.772,32.512 80.772,43.18 82.804,45.212 U1.3@98.501,45.212 ; 94.488,8.255 96.012,6.731 100.838,6.731 100.838,19.304 100.838,23.876 99.314,25.4 99.314,33.274 96.774,35.814 96.774,43.485 U1.3@98.501,45.212 ; P7_X.4@116.078,54.102 P7_X.2@114.205,54.102 113.851,54.102 112.073,52.324 100.584,52.324 98.628,50.368 98.628,45.339 U1.3@98.501,45.212
  Bottom Layer w0.508: C22.1@57.912,48.006 v9(57.912,49.276) ; R21.1@74.422,48.768 R21.1@74.422,49.022 75.438,49.022 77.343,47.117 78.867,47.117 v1(79.756,46.228) ; C9.1@90.17,10.414 90.17,11.557 v5(90.424,11.811) ; C7.1@93.98,5.588 C7.1@93.98,5.207 93.98,3.81 94.488,3.302 v1(94.488,3.048) ; U1.3@98.552,45.339 98.628,45.339 C1.2@98.628,49.2 ; P7_X.4@116.078,54.102 117.094,53.086 117.094,51.816 C41.1@118.618,51.816
  Bottom Layer w1.27: P6_X.2@49.022,5.842 P6_X.1@49.022,3.842 P6_X.3@51.022,3.842 ; P7_X.2@114.205,54.134 P7_X.1@114.205,56.102 P7_X.1@114.205,56.134 ; P7_X.4@116.205,54.134 P7_X.3@116.205,56.102 P7_X.3@116.205,56.134
-5V: C3.1 C4.2 C10.1 C11.2 U1.6 U2.3 U2.4 U2_X.3 U2_X.6 | length 96
  Top Layer w0.254: v1(92.456,3.302) 92.71,3.302 92.964,3.556 U2_X.6@92.964,4.826 ; U2_X.3@93.98,9.652 v1(93.98,11.43)
  Top Layer w0.508: v6(78.867,54.991) C4.2@78.867,57.15 ; v5(89.154,2.667) U2.3@89.154,4.064 ; v5(90.424,2.667) U2.4@90.424,4.064
  Signal Layer 2 w0.508: v5(89.154,2.667) 89.154,5.334 92.456,5.334 ; v1(92.456,3.302) 92.456,5.334 ; v1(93.98,11.43) 93.98,6.858 92.456,5.334
  Signal Layer 2 w1.27: v4(76.2,13.97) 84.709,13.97 ; U1.6@83.388,47.879 86.106,45.161 86.106,34.544 84.709,33.147 84.709,13.97 ; 89.154,5.334 84.709,9.779 84.709,13.97
  Bottom Layer w0.508: v6(78.867,54.991) 83.388,50.47 83.388,47.879 83.693,47.879 C3.1@86.106,50.292 ; v5(89.154,2.667) v5(90.424,2.667) 90.424,3.81 C10.1@90.17,4.064 ; C11.2@92.202,10.033 92.202,10.414 93.218,11.43 v1(93.98,11.43)
-50V: P4_X.2 P4_X.4 R27.1 | length 30.4
  Top Layer w0.508: P4_X.4@69.818,11.97 P4_X.2@69.818,13.97 v4(73.66,13.97) ; v1(74.676,34.544) R27.1@75.946,34.544
  Signal Layer 2 w0.508: P4_X.2@69.85,13.97 69.85,30.988 72.644,33.782 73.914,33.782 v1(74.676,34.544)
A0: U4.2 U5.2 | length 23.3
  Top Layer w0.254: U5.2@12.466,27.686 v1(12.466,29.952) ; v1(16.764,13.503) U4.2@19.558,13.503
  Bottom Layer w0.254: v1(12.466,29.952) 12.466,17.801 v1(16.764,13.503)
A1: U4.3 U5.5 | length 25.7
  Top Layer w0.254: U5.5@8.716,27.686 v1(8.716,29.892) ; v1(16.764,12.503) U4.3@19.558,12.503
  Bottom Layer w0.254: v1(8.716,29.892) 8.716,20.551 v1(16.764,12.503)
A2: U4.4 U5.6 | length 27.2
  Top Layer w0.254: U5.6@7.466,27.686 v1(7.466,29.872) ; v1(16.764,11.503) U4.4@19.558,11.503
  Bottom Layer w0.254: v1(7.466,29.872) 7.466,20.801 v1(16.764,11.503)
A3: U4.5 U5.9 | length 29.8
  Top Layer w0.254: U5.9@3.716,27.686 v1(3.716,29.878) ; v1(16.764,10.503) U4.5@19.558,10.503
  Bottom Layer w0.254: v1(3.716,29.878) 3.716,23.551 v1(16.764,10.503)
A4: U4.6 U5.12 | length 20.2
  Top Layer w0.254: v1@3.716,10.254 v1(3.716,10.287) U5.12@3.716,12.694 ; v1(16.764,9.503) U4.6@19.558,9.503
  Bottom Layer w0.254: v1(3.716,10.287) 5.621,12.192 14.075,12.192 v1(16.764,9.503)
A5: U4.7 U5.15 | length 16.4
  Top Layer w0.254: v1@7.466,10.26 v1(7.466,10.287) U5.15@7.466,12.694 ; v1(16.764,8.503) U4.7@19.558,8.503
  Bottom Layer w0.254: v1(7.466,10.287) 8.863,11.684 13.583,11.684 v1(16.764,8.503)
A6: U4.8 U5.16 | length 15.2
  Top Layer w0.254: v1@8.716,10.24 v1(8.716,10.287) U5.16@8.716,12.694 ; v1(16.764,7.503) U4.8@19.558,7.503
  Bottom Layer w0.254: v1(8.716,10.287) 9.605,11.176 13.091,11.176 v1(16.764,7.503)
A7: U4.19 U5.19 | length 28.5
  Top Layer w0.254: v1@12.466,10.18 v1(12.466,10.287) U5.19@12.466,12.694 ; v1(16.764,6.35) 19.812,3.302 25.908,3.302 27.203,2.007 30.709,2.007 31.708,3.006 U4.19@31.708,5.353
  Signal Layer 1 w0.254: v1(12.466,10.287) 13.843,10.287 14.986,9.144 14.986,8.128 v1(16.764,6.35)
A8: U4.20 U6.52 | length 69.8
  Top Layer w0.254: v1(13.716,45.212) 13.924,45.212 14.419,45.707 U6.52@16.66,45.707 ; v1(32.708,2.852) U4.20@32.708,5.353
  Signal Layer 1 w0.254: v1(13.716,45.212) 13.97,45.212 16.256,47.498 16.256,50.292 v1(15.24,51.308)
  Bottom Layer w0.254: v1(15.24,51.308) 15.748,51.308 21.844,45.212 21.844,21.51 21.336,21.002 21.336,20.574 32.708,9.202 v1(32.708,2.852)
A9: U4.21 U6.51 | length 71.2
  Top Layer w0.254: v1@13.97,46.332 U6.51@16.66,46.332 ; v1(33.708,2.868) U4.21@33.708,5.353
  Signal Layer 1 w0.254: v1(13.97,46.228) 15.748,48.006 15.748,50.038 15.24,50.546 14.732,50.546 13.97,51.308 v1(13.97,52.07)
  Bottom Layer w0.254: v1(13.97,52.07) 15.748,52.07 22.352,45.466 22.352,20.32 33.708,8.964 v1(33.708,2.868)
A10: U4.45 U6.50 | length 36.2
  Top Layer w0.254: v1(12.954,46.482) 13.429,46.957 U6.50@16.66,46.957 ; U4.45@32.708,24.653 v1(32.708,27.104)
  Signal Layer 1 w0.254: v1(12.954,46.482) 12.954,44.958 13.462,44.45 13.97,44.45 14.732,45.212 15.494,45.212 31.496,29.21 31.496,28.316 v1(32.708,27.104)
A11: U4.59 U6.49 | length 40.3
  Top Layer w0.254: v1(12.7,48.26) 13.378,47.582 U6.49@16.66,47.582 ; v1(17.343,20.503) U4.59@19.558,20.503
  Bottom Layer w0.254: v1(12.7,48.26) 13.208,47.752 16.256,47.752 19.812,44.196 19.812,22.352 17.963,20.503 v1(17.343,20.503)
A12: U4.60 U6.48 | length 40.9
  Top Layer w0.254: v1(13.462,48.768) 14.023,48.207 U6.48@16.66,48.207 ; v1(17.327,19.503) U4.60@19.558,19.503
  Bottom Layer w0.254: v1(13.462,48.768) 13.97,48.26 16.51,48.26 20.32,44.45 20.32,22.142 19.812,21.634 19.812,21.336 17.979,19.503 v1(17.327,19.503)
A13: U4.61 U6.47 | length 41.4
  Top Layer w0.254: v1(14.224,49.276) 14.668,48.832 U6.47@16.66,48.832 ; v1(17.311,18.503) U4.61@19.558,18.503
  Bottom Layer w0.254: v1(14.224,49.276) 14.732,48.768 16.764,48.768 20.828,44.704 20.828,21.931 20.32,21.423 20.32,20.828 17.995,18.503 v1(17.311,18.503)
A14: U4.62 U6.46 | length 42
  Top Layer w0.254: v1(14.986,49.784) 15.313,49.457 U6.46@16.66,49.457 ; v1(17.295,17.503) U4.62@19.558,17.503
  Bottom Layer w0.254: v1(14.986,49.784) 15.494,49.276 17.018,49.276 21.336,44.958 21.336,21.721 20.828,21.213 20.828,20.32 18.011,17.503 v1(17.295,17.503)
AD0: U4.29 U5.3 U6.67 | length 74.8
  Top Layer w0.254: U5.3@11.216,27.686 v1(11.216,29.932) 12.018,30.734 14.986,30.734 16.51,29.21 22.098,29.21 22.722,29.834 U6.67@22.722,30.895 ; U4.29@38.858,11.503 v1(41.837,11.503)
  Signal Layer 1 w0.254: v1(11.216,29.932) 11.216,28.662 11.938,27.94 20.828,27.94 23.876,24.892 37.596,24.892 39.628,26.924 43.942,26.924 46.482,24.384 46.482,14.478 43.507,11.503 v1(41.837,11.503)
AD1: U4.30 U5.4 U6.66 | length 71.2
  Top Layer w0.254: U5.4@9.966,27.686 v1(9.966,29.912) ; v1(14.732,36.068) 14.732,36.322 15.367,36.957 U6.66@16.66,36.957 ; U4.30@38.858,12.503 v1(41.837,12.503) v1@41.853,12.503
  Signal Layer 1 w0.254: v1(9.966,29.912) 9.966,28.388 10.922,27.432 20.618,27.432 23.666,24.384 37.806,24.384 39.838,26.416 43.732,26.416 45.974,24.174 45.974,15.24 43.237,12.503 v1@41.853,12.503
  Signal Layer 2 w0.254: v1(9.966,29.912) 9.966,30.54 10.668,31.242 11.049,31.242 14.478,34.671 14.478,35.052 14.732,35.306 v1(14.732,36.068)
AD2: U4.31 U5.7 U6.65 | length 77
  Top Layer w0.254: U5.7@6.216,27.686 v1(6.216,29.838) ; v1(14.224,36.83) 14.522,36.83 15.21,37.518 16.596,37.518 U6.65@16.66,37.582 ; U4.31@38.858,13.503 v1(41.837,13.503) v1@41.869,13.503
  Signal Layer 1 w0.254: v1(6.216,29.838) 6.216,28.836 8.128,26.924 20.407,26.924 23.455,23.876 38.017,23.876 40.049,25.908 43.521,25.908 45.466,23.963 45.466,15.748 43.221,13.503 v1@41.869,13.503
  Signal Layer 2 w0.254: v1(6.216,29.838) 6.216,30.854 7.112,31.75 10.668,31.75 13.97,35.052 13.97,36.576 v1(14.224,36.83)
AD3: U4.34 U5.8 U6.63 | length 83.8
  Top Layer w0.254: U5.8@4.966,27.686 v1(4.966,29.858) ; v1(13.716,38.608) 13.94,38.832 U6.63@16.66,38.832 ; U4.34@38.858,16.503 v1(41.837,16.503) v1@41.903,16.503
  Signal Layer 1 w0.254: v1(4.966,29.858) 4.966,27.546 6.096,26.416 20.197,26.416 23.245,23.368 38.227,23.368 40.259,25.4 43.311,25.4 44.958,23.753 44.958,18.542 42.919,16.503 v1@41.903,16.503
  Bottom Layer w0.254: v1(4.966,29.858) 4.966,30.874 5.588,31.496 14.732,31.496 16.764,33.528 16.764,36.576 14.732,38.608 v1(13.716,38.608)
AD4: U4.35 U5.13 U6.62 | length 85.8
  Top Layer w0.254: v1@4.966,10.274 v1(4.966,10.287) U5.13@4.966,12.694 ; v1(12.954,39.116) 13.295,39.457 U6.62@16.66,39.457 ; U4.35@38.858,17.503 v1(41.837,17.503) v1@41.887,17.503
  Signal Layer 1 w0.254: v1(4.966,10.287) 4.966,14.11 v1(14.732,23.876) 17.657,23.876 18.919,23.876 19.935,22.86 38.437,22.86 40.469,24.892 43.1,24.892 44.45,23.542 44.45,19.05 42.903,17.503 v1@41.887,17.503
  Bottom Layer w0.254: v1(12.954,39.116) 13.208,39.37 14.942,39.37 17.272,37.04 17.272,33.318 14.732,30.778 v1(14.732,23.876)
AD5: U4.36 U5.14 U6.61 | length 86.4
  Top Layer w0.254: v1@6.216,10.28 v1(6.216,10.287) U5.14@6.216,12.694 ; v1(12.192,39.624) 12.65,40.082 U6.61@16.66,40.082 ; U4.36@38.858,18.503 v1(41.837,18.503) v1@41.871,18.503
  Signal Layer 1 w0.254: v1(6.216,10.287) 6.216,14.09 v1(14.732,22.606) 15.494,23.368 17.867,23.368 18.709,23.368 19.725,22.352 38.648,22.352 40.68,24.384 42.89,24.384 43.942,23.332 43.942,19.558 42.887,18.503 v1@41.871,18.503
  Bottom Layer w0.254: v1@12.319,39.751 12.7,40.132 13.462,40.132 13.716,39.878 15.494,39.878 17.78,37.592 17.78,33.107 15.494,30.821 15.494,23.368 v1(14.732,22.606)
AD6: U4.37 U5.17 U6.59 | length 84.5
  Top Layer w0.254: v1@9.966,10.22 v1(9.966,10.287) U5.17@9.966,12.694 ; v1(12.192,41.91) 12.77,41.332 U6.59@16.66,41.332 ; U4.37@38.858,19.503 v1(41.837,19.503) v1@41.855,19.503
  Signal Layer 1 w0.254: v1(9.966,10.287) 9.966,16.57 v1(14.986,21.59) 16.256,22.86 18.078,22.86 18.498,22.86 19.514,21.844 38.858,21.844 40.89,23.876 42.679,23.876 43.434,23.121 43.434,20.066 42.871,19.503 v1@41.855,19.503
  Bottom Layer w0.254: v1(12.192,41.91) 12.7,41.402 14.478,41.402 15.494,40.386 16.002,40.386 18.288,38.1 18.288,32.897 16.256,30.865 16.256,23.114 15.494,22.352 15.494,22.098 v1(14.986,21.59)
AD7: U4.38 U5.18 U6.58 | length 81.9
  Top Layer w0.254: v1@11.216,10.2 v1(11.216,10.287) U5.18@11.216,12.694 ; v1(12.954,42.418) 13.415,41.957 U6.58@16.66,41.957 ; U4.38@38.858,20.503 v1(41.837,20.503) v1@41.839,20.503
  Signal Layer 1 w0.254: v1(11.216,10.287) 11.216,16.55 v1(14.986,20.32) 17.018,22.352 18.288,22.352 19.304,21.336 39.116,21.336 41.148,23.368 42.469,23.368 42.926,22.911 42.926,20.574 42.855,20.503 v1@41.839,20.503
  Bottom Layer w0.254: v1(12.954,42.418) 13.462,41.91 14.732,41.91 15.748,40.894 16.51,40.894 18.796,38.608 18.796,32.686 17.018,30.908 17.018,23.114 16.002,22.098 16.002,21.336 v1(14.986,20.32)